# Altium PCB UPCNSL-ABS-PVC-2A.PcbDoc
Units mm, origin at the board's own origin, x right, y up, seen from the top; angles counter-clockwise.
Board outline 82 x 98.4 mm, 2 copper layers (Top Layer, Bottom Layer), stack 0.325 mm thick; 59 components, 56 nets, 164 pads, 48 vias.
Unrouted connection lines stored in the file: 5.
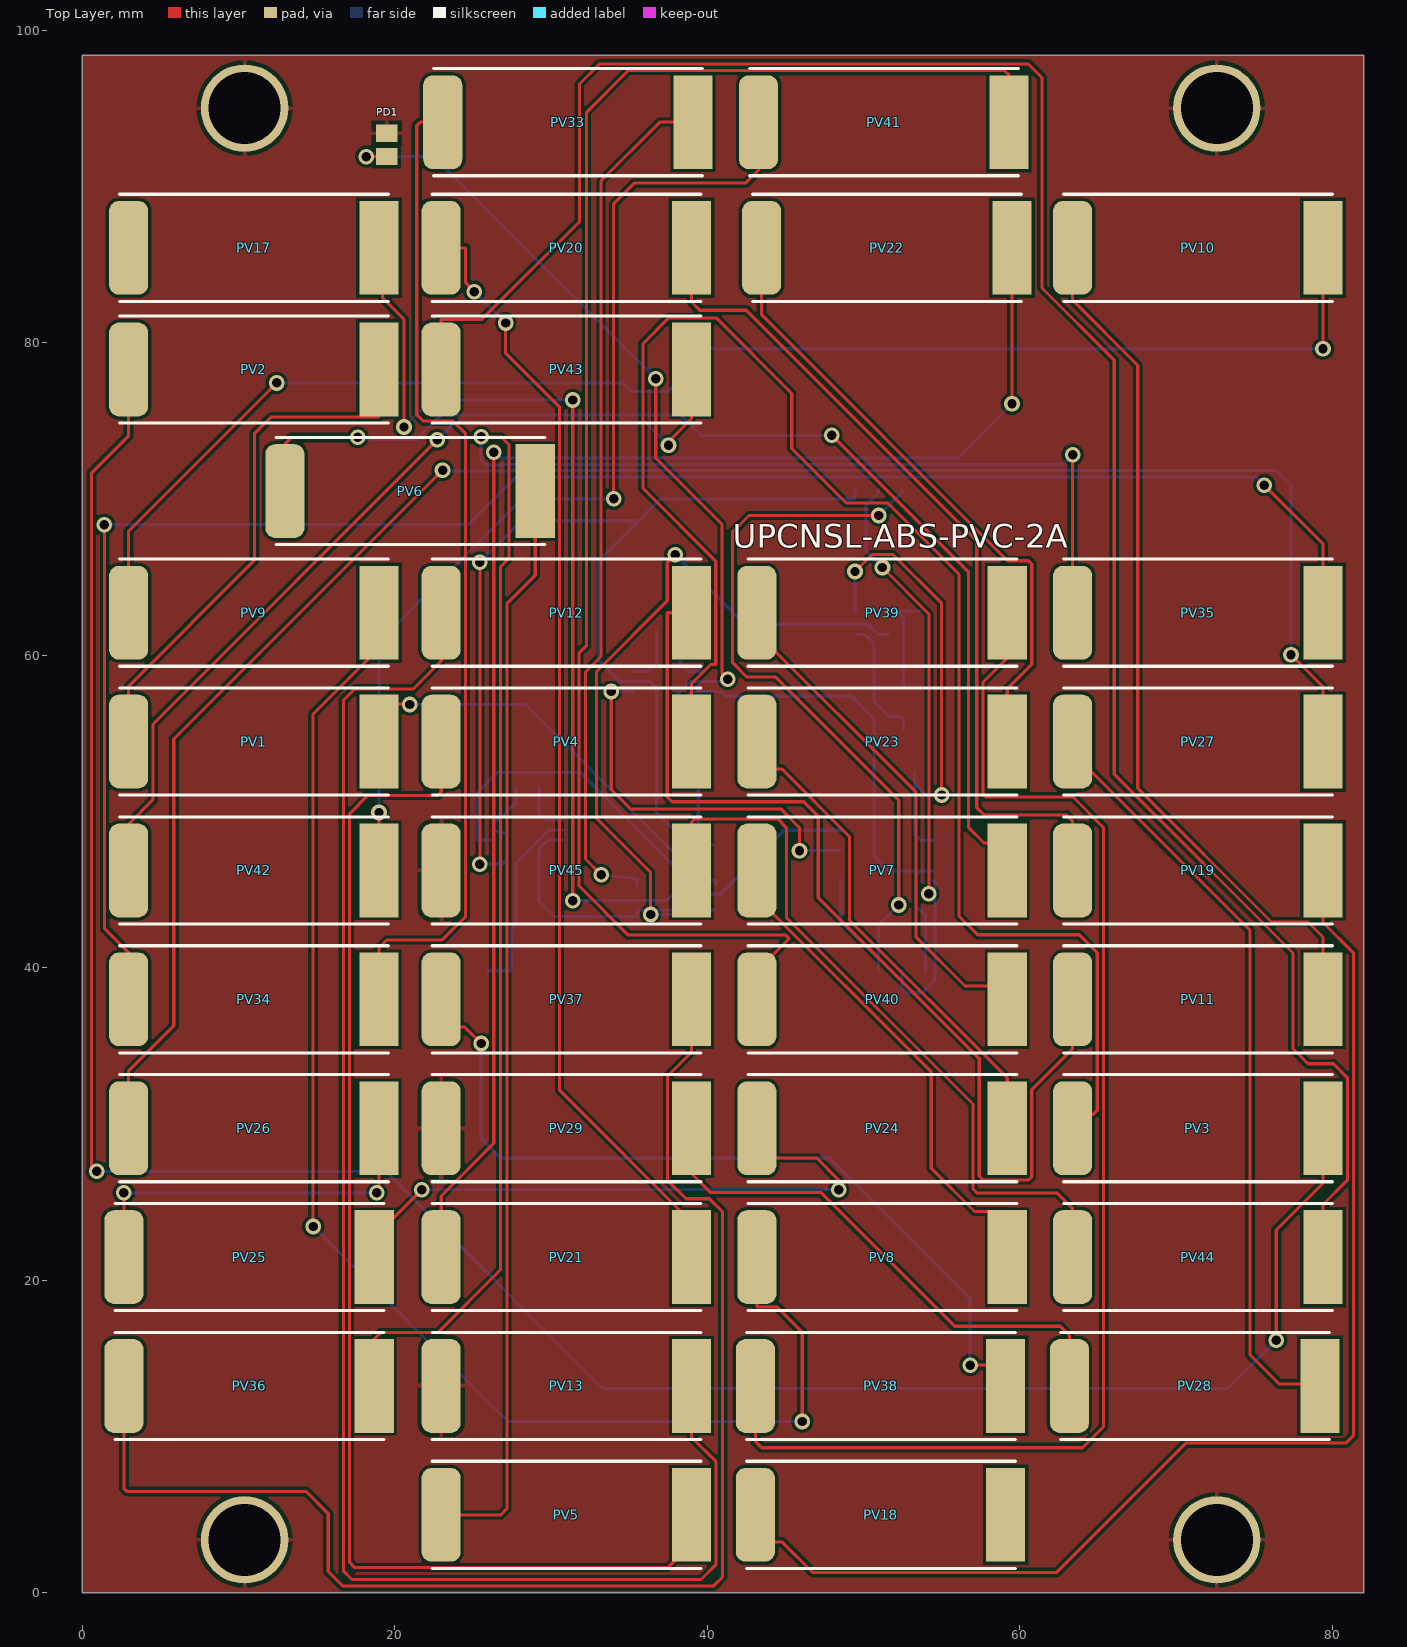
[diagram p0: Top Layer view]
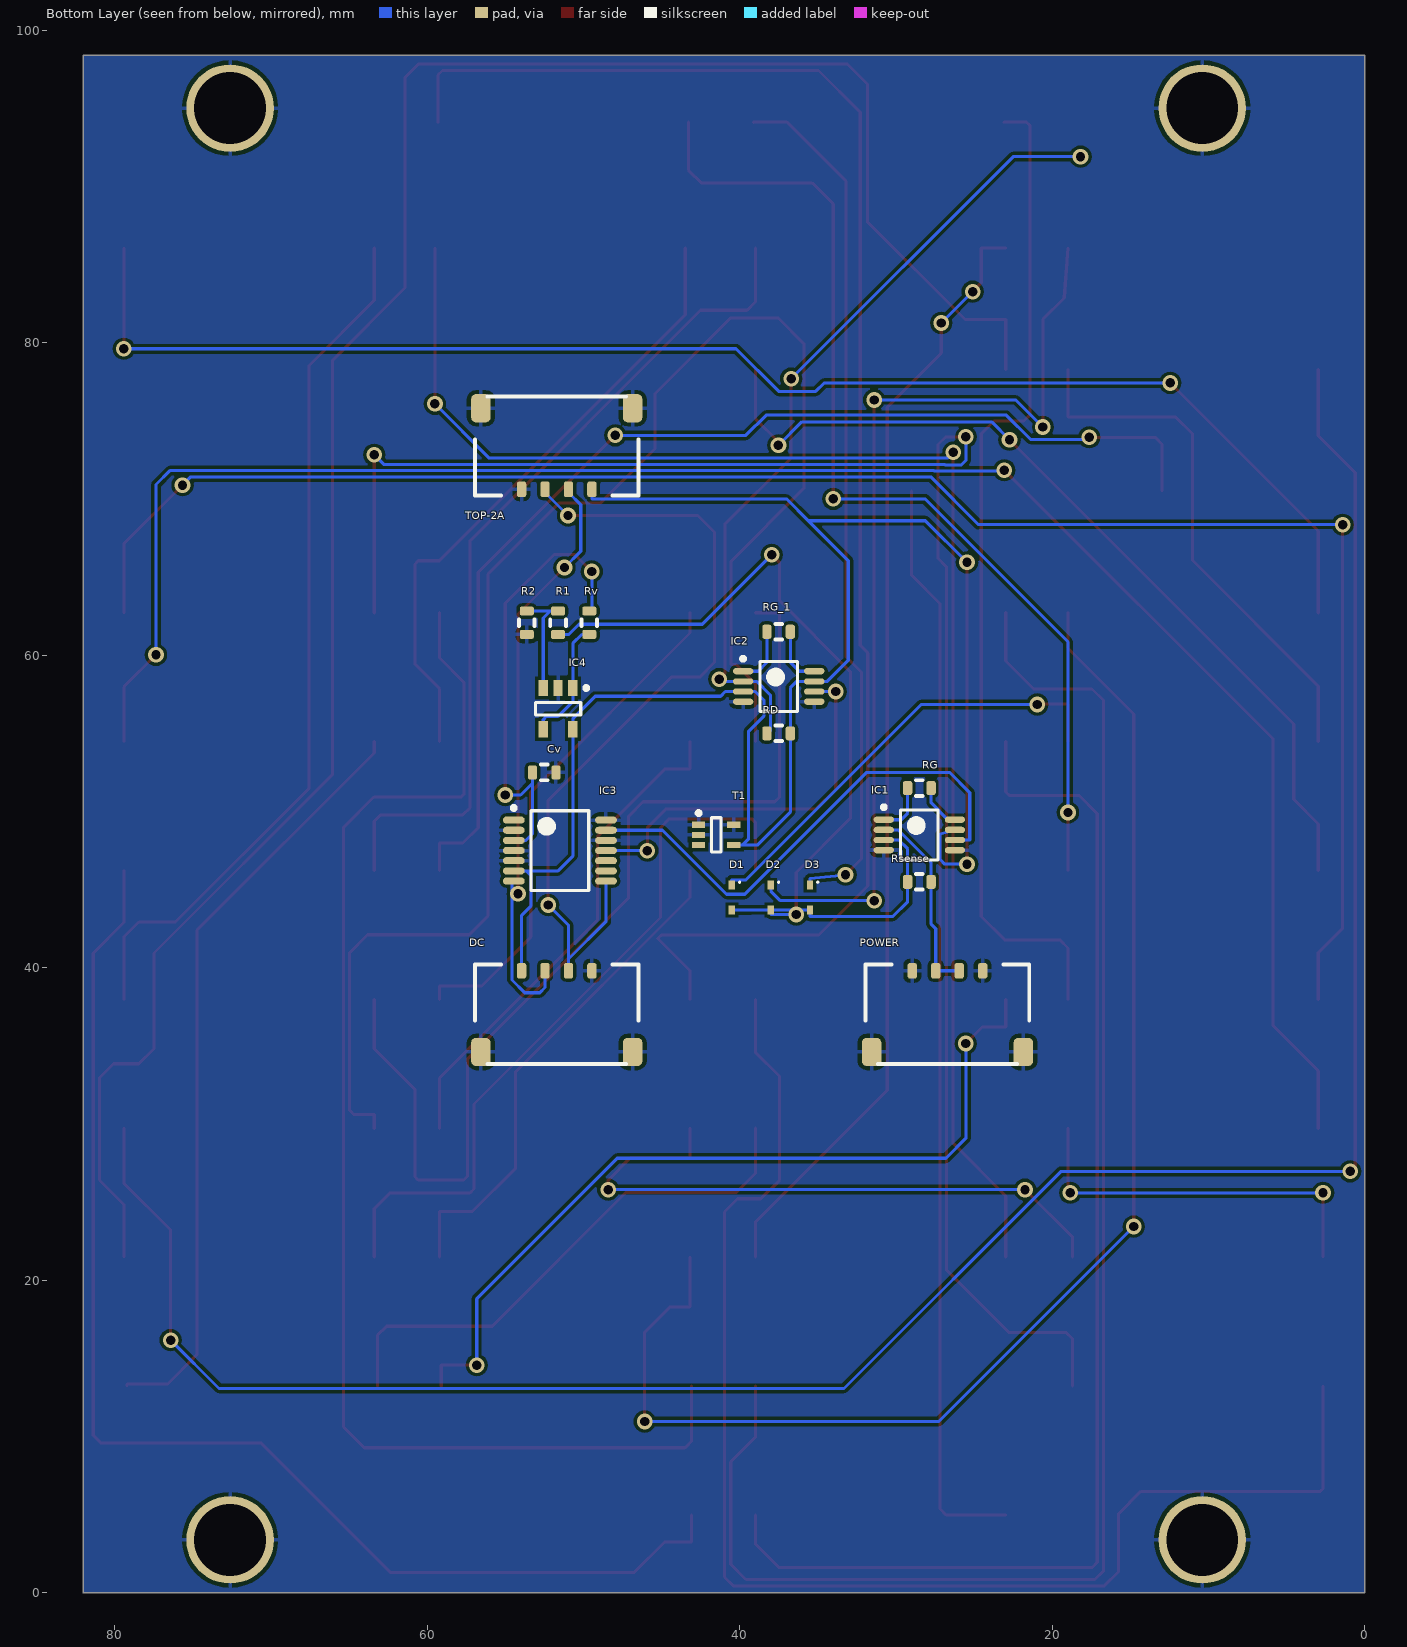
[diagram p1: Bottom Layer view, seen from below]
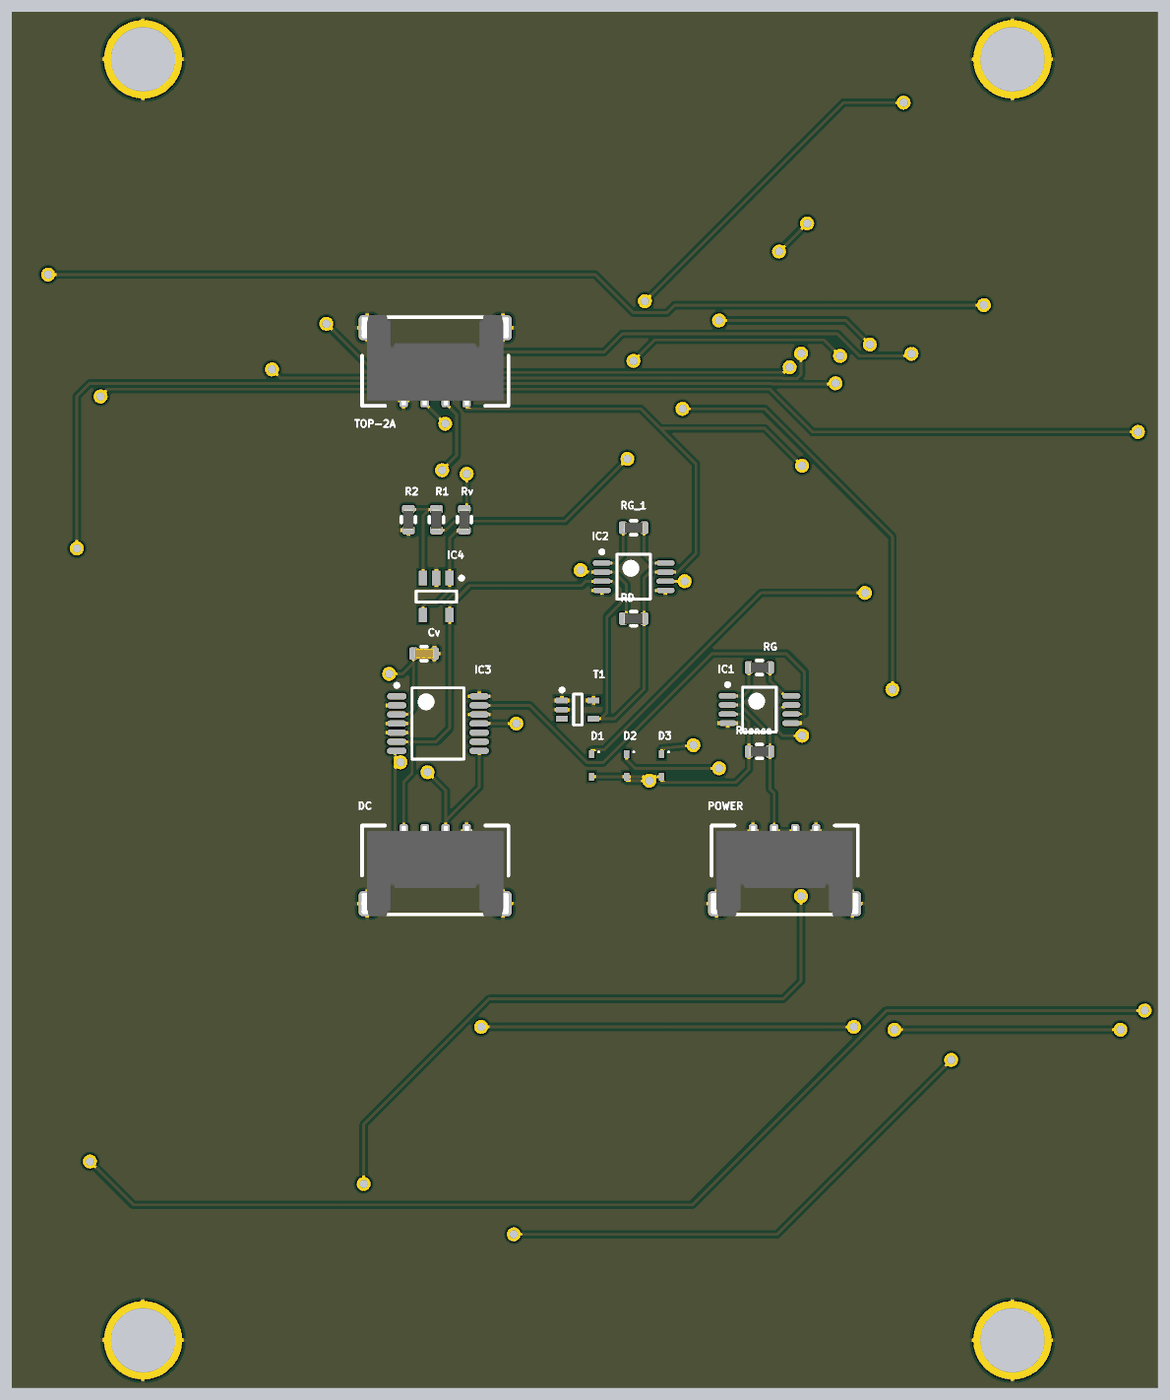
[diagram p2: 3D render of the assembled board from below, using the file's embedded part models]

## Layer stack, top to bottom
Top Solder: solder mask 0.0102, Solder Resist, Dk 3.5
Top Layer: signal copper 0.0356
Dielectric 1: core 0.254, FR-4, Dk 4.2
Bottom Layer: signal copper 0.0356
Bottom Solder: solder mask 0.0102, Solder Resist, Dk 3.5

## Board outline
0,0 82,0 82,98.4 0,98.4

## Design rules (kind name [scope] priority, off if disabled: settings)
Clearance [All] p1: gap=0.2
PolygonConnect [All] p1: connectstyle=Relief reliefconductorwidth=0.256 reliefentries=4 polygonreliefangle="90 Angle" airgapwidth=0.256
RoutingVias [All] p1: holewidth=0.6 width=1 viastyle="Through Hole" minholewidth=0.711 minwidth=1.27 maxholewidth=0.711 maxwidth=1.27
SolderMaskExpansion [All] p1: expansion=0.102
UnpouredPolygon [All] p1: allowunpoured=FALSE
Width [All] p1: maxlimit=1 minlimit=0.2 preferedwidth=0.2
29 further rules are at their usual default settings.

## Components (designator, comment, footprint, x,y, rotation, side; value= is the part's Value field where it differs from the comment)
Cv "CAP0603" CAP0603 52.5,52.5 r0 bottom
D1 "DIODE" "(Schottky diode) SODFL160X70-2N" 40.5,44.5 r270 bottom
D2 "DIODE" "(Schottky diode) SODFL160X70-2N" 38,44.5 r270 bottom
D3 "DIODE" "(Schottky diode) SODFL160X70-2N" 35.5,44.5 r270 bottom
DC "5040500491" 5040500491 51.7,34.619 r180 bottom
IC1 "AD623ARMZ" AD623ARMZ 28.5,48.5 r180 bottom
IC2 "AD623ARMZ" AD623ARMZ 37.5,58 r180 bottom
IC3 "MCP3424" MCP3424 51.5,47.5 r180 bottom
IC4 "AD8603" AD8603 51.616,56.577 r270 bottom
PD1 "Photo Sen" C0805 19.493,92.65 r270 top
POWER "5040500491" 5040500491 26.7,34.619 r180 bottom
PV1 "PVCELL" "PV CELLS" 11,54.473 r180 top
PV2 "PVCELL" "PV CELLS" 11,78.282 r180 top
PV3 "PVCELL" "PV CELLS" 71.4,29.736 r180 top
PV4 "PVCELL" "PV CELLS" 31,54.473 r180 top
PV5 "PVCELL" "PV CELLS" 31,5 r180 top
PV6 "PVCELL" "PV CELLS" 21,70.5 r180 top
PV7 "PVCELL" "PV CELLS" 51.2,46.227 r180 top
PV8 "PVCELL" "PV CELLS" 51.2,21.491 r180 top
PV9 "PVCELL" "PV CELLS" 11,62.718 r180 top
PV10 "PVCELL" "PV CELLS" 71.4,86.064 r180 top
PV11 "PVCELL" "PV CELLS" 71.4,37.982 r180 top
PV12 "PVCELL" "PV CELLS" 31,62.718 r180 top
PV13 "PVCELL" "PV CELLS" 31,13.245 r180 top
PV17 "PVCELL" "PV CELLS" 11,86.064 r180 top
PV18 "PVCELL" "PV CELLS" 51.1,5 r180 top
PV19 "PVCELL" "PV CELLS" 71.4,46.227 r180 top
PV20 "PVCELL" "PV CELLS" 31,86.064 r180 top
PV21 "PVCELL" "PV CELLS" 31,21.491 r180 top
PV22 "PVCELL" "PV CELLS" 51.5,86.064 r180 top
PV23 "PVCELL" "PV CELLS" 51.2,54.473 r180 top
PV24 "PVCELL" "PV CELLS" 51.2,29.736 r180 top
PV25 "PVCELL" "PV CELLS" 10.7,21.491 r180 top
PV26 "PVCELL" "PV CELLS" 11,29.736 r180 top
PV27 "PVCELL" "PV CELLS" 71.4,54.473 r180 top
PV28 "PVCELL" "PV CELLS" 71.2,13.245 r180 top
PV29 "PVCELL" "PV CELLS" 31,29.736 r180 top
PV33 "PVCELL" "PV CELLS" 31.1,94.1 r180 top
PV34 "PVCELL" "PV CELLS" 11,37.982 r180 top
PV35 "PVCELL" "PV CELLS" 71.4,62.718 r180 top
PV36 "PVCELL" "PV CELLS" 10.7,13.245 r180 top
PV37 "PVCELL" "PV CELLS" 31,37.982 r180 top
PV38 "PVCELL" "PV CELLS" 51.1,13.245 r180 top
PV39 "PVCELL" "PV CELLS" 51.2,62.718 r180 top
PV40 "PVCELL" "PV CELLS" 51.2,37.982 r180 top
PV41 "PVCELL" "PV CELLS" 51.3,94.1 r180 top
PV42 "PVCELL" "PV CELLS" 11,46.227 r180 top
PV43 "PVCELL" "PV CELLS" 31,78.282 r180 top
PV44 "PVCELL" "PV CELLS" 71.4,21.491 r180 top
PV45 "PVCELL" "PV CELLS" 31,46.227 r180 top
R1 "RES0603" RES0603 51.616,62.077 r270 bottom
R2 "RES0603" RES0603 53.616,62.077 r90 bottom
RD "RES0603" RES0603 37.5,55 r180 bottom
RG "RES0603" RES0603 28.5,51.5 r180 bottom
RG_1 "RES0603" RES0603 37.5,61.5 r180 bottom
Rsense "RES0603" RES0603 28.5,45.5 r0 bottom
Rv "RES0603" RES0603 49.616,62.077 r90 bottom
T1 "LMT84 DCK" DCK/SOT65P210X110-5N 41.5,48.5 r180 bottom
TOP-2A "5040500491" 5040500491 51.7,75.8 r0 bottom

## Footprints (in the part's own frame and the unit in brackets; to place one, negate y for a bottom-side part, rotate by r counter-clockwise, add the part's x,y. Pads: shape width x height; smd on the part's side, far side on the other; paste and mask are expansions set on the pad)
5040500491 [mm] "1.50mm Pitch Pico-Lock™ Surface Mount Wire-to-Board Header, Right Angle,2.00mm Mated Height, Positive Side Locks, 4 Circuits"
  rrect50% 1.25x1.8 smd: 0(-4.855,0) 0(4.855,0)
  rrect50% 0.6x1 smd: 1(-2.25,5.19) 2(-0.75,5.19) 3(0.75,5.19) 4(2.25,5.19)
  silkscreen extent -5.23,-0.76 5.23,5.59, body extent -5.27,-0.9 5.28,5.54, height 1.98
"(Schottky diode) SODFL160X70-2N" [mm] "SODFL, 2-Leads, Body 0,80x1,60mm, IPC Medium Density"
  rect 0.55x0.4 smd: A(-0.8,0) K(0.8,0)
  silkscreen extent -1.02,0.45 -0.93,0.55, body extent -0.65,-0.45 0.65,0.45, height 0.7
AD623ARMZ [mm] "Single-Supply, Rail-to-Rail, Instrumentation Amplifier"
  oval 1.3x0.4 smd: 1(-2.275,0.975) 2(-2.275,0.325) 3(-2.275,-0.325) 4(-2.275,-0.975) 5(2.275,-0.975) 6(2.275,-0.325) 7(2.275,0.325) 8(2.275,0.975)
  silkscreen extent -2.4,-1.6 1.2,1.9, body extent -1.6,-1.6 1.6,1.6, height 1.1
AD8603 [mm] "SOT23, 5-Leads, Body 2,90x2,80mm, Pitch 0,95mm, IPC Medium Density"
  rect 1.05x0.6 smd: 1(-1.325,0.95) 2(-1.325,0) 3(-1.325,-0.95) 4(1.325,-0.95) 5(1.325,0.95)
  silkscreen extent -1.45,-1.45 0.4,1.92, body extent -0.8,-1.45 0.8,1.45, height 1
C0805 [mm] "Chip Capacitor, Body 2.0x1.3mm, IPC High Density"
  rect 1.1x1.4 smd: 1(-0.75,0) 2(0.75,0)
  body extent -1.1,-0.72 1.1,0.72, height 1.4
CAP0603 [mm] "Capacitor Chip Inductor, Body 0.6x0.3mm, IPC High Density"
  rrect50% 0.6x0.9 smd: 1(-0.75,0) 2(0.75,0)
  silkscreen extent -0.2,-0.5 0.2,0.5, body extent -0.76,-0.38 0.76,0.38, height 0.76
DCK/SOT65P210X110-5N [mm] "SOT23, 5-Leads, Body 2,00x2,10mm, Pitch 0,65mm, IPC Medium Density"
  rect 0.85x0.4 smd: 1(-1.125,0.65) 2(-1.125,0) 3(-1.125,-0.65) 4(1.125,-0.65) 5(1.125,0.65)
  silkscreen extent -1.25,-1.1 0.3,1.52, body extent -0.7,-1.07 0.7,1.08, height 1.1
MCP3424 [mm] "18-Bit, Multi-Channel ?S Analog-to-Digital Converter with  I2C"
  oval 1.4x0.45 smd: 1(-2.95,1.95) 2(-2.95,1.3) 3(-2.95,0.65) 4(-2.95,0) 5(-2.95,-0.65) 6(-2.95,-1.3) 7(-2.95,-1.95) 8(2.95,-1.95) 9(2.95,-1.3) 10(2.95,-0.65) 11(2.95,0) 12(2.95,0.65) 13(2.95,1.3) 14(2.95,1.95)
  silkscreen extent -3.08,-2.55 1.85,2.85, body extent -2.25,-2.55 2.25,2.55, height 1.2
"PV CELLS" [mm] "IXYS KXOB22-12X1L-ND"
  rect 2.5x6 smd: 1(-7.993,0)
  rrect50% 2.5x6 smd: 2(8.025,0)
  silkscreen extent -8.6,-3.43 8.6,3.43, body extent -8.97,-3.5 9.03,3.5, height 1.8
RES0603 [mm] "Resistor Chip Inductor, Body 0.6x0.3mm, IPC High Density"
  rrect50% 0.6x0.9 smd: 1(-0.75,0) 2(0.75,0)
  silkscreen extent -0.2,-0.5 0.2,0.5, body extent -0.76,-0.38 0.76,0.38, height 0.76

## Part data
Cv: "Capacitor"
DC POWER TOP-2A: library part MOLEX_5040500491, "1.50mm Pitch Pico-Lock™ Surface Mount Wire-to-Board Header, Right Angle,2.00mm Mated Height, Positive Side Locks, 4 Circuits"
IC3: "18-Bit, Multi-Channel ?S Analog-to-Digital Converter with  I2C"
PD1: "Photosensitive Diode"
PV1 PV2 PV3 PV4 PV5 PV6 PV7 PV8 PV9 PV10 PV11 PV12 PV13 PV17 PV18 PV19 PV20 PV21 PV22 PV23 PV24 PV25 PV26 PV27 PV28 PV29 PV33 PV34 PV35 PV36 PV37 PV38 PV39 PV40 PV41 PV42 PV43 PV44 PV45: library part PVCELLS, "IXYS KXOB22-12X1L-ND"
R1 R2 RD RG RG_1 Rsense Rv: "Resistor"

## Free pads (board coordinates)
  round 5.6 hole 4.6: 0(10.4,95) 1(72.6,95) 2(72.6,3.4) 3(10.4,3.4)

## Via types
v1: diameter 1, hole 0.6, Top Layer to Bottom Layer, 48 vias

## Nets (pads, with @x,y where several pads share a name; then routed paths per layer and width w, separated by ;. In a path a pad name is that pad's centre, name@x,y a point inside that pad or via, vN(x,y) a via of type N, cw(c..) or ccw(c..) an arc to the next point about the centre after c; other vN are vias at no path point)
5V: DC.1 IC1.7 IC2.3 IC2.7 IC3.6 IC4.5 RD.2 T1.4 TOP-2A.1 | length 119.7
  Top Layer w0.2: v1(25.451,46.634) v1(25.451,65.938)
  Bottom Layer w0.2: v1(25.451,46.634) 26.873,46.634 27.178,46.939 27.178,48.565 IC1.7 ; v1(25.451,65.938) 28.118,68.605 35.611,68.605 ; T1.4 39.827,47.85 ; TOP-2A.1 49.45,69.999 37.004,69.999 35.611,68.605 ; DC.1 53.95,43.352 53.353,43.949 53.353,45.908 53.645,46.2 ; IC3.6 53.645,46.2 ; 35.611,68.605 33.045,66.04 33.045,59.671 34.392,58.325 IC2.7 36.337,58.325 36.75,57.912 RD.2 36.75,49.962 38.862,47.85 39.827,47.85 ; 39.827,47.85 39.421,48.256 39.421,55.143 38.43,56.134 38.43,57.099 39.006,57.675 IC2.3 40.908,57.675 41.213,57.371 49.233,57.371 50.666,55.938 IC4.5 50.666,47.147 51.613,46.2 53.645,46.2
GND: Cv.1 DC.0 DC.4 IC1.4 IC1.5 IC2.4 IC2.5 IC3.2 IC3.4 IC3.5 IC3.12 IC3.14 IC4.2 pad.0 pad.1 pad.2 pad.3 PD1.1 POWER.0 POWER.1 POWER.4 PV13.2 PV29.2 PV45.2 R2.1 T1.1 T1.2 T1.5 TOP-2A.0 TOP-2A.4
IRR: IC2.6 IC3.11 | length 24.8
  Top Layer w0.2: v1(33.852,57.675) 33.852,51.41 35.09,50.171 44.698,50.171 45.898,48.971 v1(45.898,47.5)
  Bottom Layer w0.2: v1(33.852,57.675) IC2.6 ; v1(45.898,47.5) IC3.11
ISENSE: IC1.6 IC3.13 | length 32.7
  Bottom Layer w0.2: IC1.6 25.273,48.175 25.273,51.206 26.568,52.502 31.873,52.502 39.671,44.704 40.837,44.704 44.933,48.8 IC3.13
NetIC1_1: IC1.1 RG.1 | length 3.3
  Bottom Layer w0.2: RG.1 29.25,49.892 29.667,49.475 IC1.1
NetIC1_8: IC1.8 RG.2 | length 2.9
  Bottom Layer w0.2: IC1.8 26.674,49.475 27.75,50.551 RG.2
NetIC2_1: IC2.1 RG_1.1 | length 3.7
  Bottom Layer w0.2: RG_1.1 38.25,59.538 38.813,58.975 IC2.1
NetIC2_2: IC2.2 PD1.2 RD.1 | length 53.2
  Top Layer w0.2: v1(18.186,91.9) PD1.2 ; v1(36.703,77.699) 36.703,72.619 40.943,68.378 40.943,58.828 v1(41.3,58.471)
  Bottom Layer w0.2: v1(18.186,91.9) 22.502,91.9 v1(36.703,77.699) ; RD.1 38.25,55.143 38.024,55.143 38.024,57.436 38.913,58.325 IC2.2 41.155,58.325 v1(41.3,58.471)
NetIC2_8: IC2.8 RG_1.2 | length 3.7
  Bottom Layer w0.2: IC2.8 36.187,58.975 36.75,59.538 RG_1.2
NetPV1_2: PV1.2 PV2.1 | length 34.5
  Top Layer w0.2: PV1.2 2.975,58.024 11.024,66.072 11.024,74.168 12.09,75.235 18.993,75.235 PV2.1
NetPV2_2: PV2.2 PV3.1 | length 149.7
  Top Layer w0.2: v1(0.94,26.975) 0.61,27.305 0.61,71.679 2.975,74.045 PV2.2 ; v1(76.403,16.18) 76.403,23.223 79.393,26.213 PV3.1
  Bottom Layer w0.2: v1(0.94,26.975) 19.431,26.975 33.325,13.081 73.304,13.081 v1(76.403,16.18)
NetPV3_2: PV3.2 PV4.1 | length 102.3
  Top Layer w0.2: PV4.1 38.993,58.17 40.234,59.411 40.543,59.411 40.543,66.018 35.89,70.671 35.89,79.934 37.541,81.585 40.564,81.585 45.401,76.747 45.401,73.221 48.874,69.748 51.531,69.748 56.109,65.171 56.109,43.307 57.302,42.113 63.805,42.113 64.948,40.97 64.948,30.886 64.668,30.607 63.375,30.607 PV3.2
NetPV4_2: PV4.2 PV5.1 | length 82.1
  Top Layer w0.2: PV4.2 22.975,51.245 22.758,51.029 18.288,51.029 17.12,49.86 17.12,1.956 17.45,1.626 37.469,1.626 38.993,3.15 PV5.1
NetPV5_2: PV5.2 PV6.1 | length 70.3
  Top Layer w0.2: PV5.2 22.975,4.978 26.772,4.978 27.178,5.385 27.178,63.297 28.993,65.112 PV6.1
NetPV6_2: PV6.2 PV7.1 | length 72.8
  Top Layer w0.2: PV6.2 12.975,73.504 13.411,73.939 v1(17.628,73.939) ; v1(47.955,74.066) 56.718,65.303 56.718,48.971 57.709,47.981 59.193,47.981 PV7.1
  Bottom Layer w0.2: v1(17.628,73.939) 17.767,73.8 21.375,73.8 22.937,75.362 38.303,75.362 39.599,74.066 v1(47.955,74.066)
NetPV7_2: PV7.2 PV8.1 | length 32.6
  Top Layer w0.2: PV7.2 43.175,44.501 54.331,33.345 54.331,27.178 57.099,24.409 59.193,24.409 PV8.1
NetPV9_2: PV9.2 PV10.1 | length 93.4
  Top Layer w0.2: PV9.2 2.975,67.948 v1(12.446,77.419) ; v1(79.393,79.604) PV10.1
  Bottom Layer w0.2: v1(12.446,77.419) 34.592,77.419 35.135,76.877 37.501,76.877 40.228,79.604 v1(79.393,79.604)
NetPV10_2: PV10.2 PV11.1 | length 56.1
  Top Layer w0.2: PV10.2 63.375,82.702 67.539,78.539 67.539,51.486 76.098,42.926 78.435,42.926 79.393,41.968 PV11.1
NetPV11_2: PV11.2 PV12.1 | length 66.8
  Top Layer w0.2: PV12.1 37.44,62.718 37.44,50.927 37.744,50.622 46.177,50.622 47.102,49.698 47.102,44.484 57.404,34.181 57.404,26.675 57.663,26.416 60.554,26.416 60.757,26.619 60.757,32.207 63.375,34.826 PV11.2
NetPV12_2: PV12.2 PV13.1 | length 102.6
  Top Layer w0.2: PV12.2 22.975,59.627 21.184,57.836 17.45,57.836 16.713,57.099 16.713,1.422 17.272,0.864 39.599,0.864 40.564,1.829 40.564,8.386 38.993,9.957 PV13.1
NetPV17_2: PV17.2 PV18.1
NetPV18_2: PV18.2 PV19.1 | length 81.4
  Top Layer w0.2: PV18.2 43.075,3.251 44.806,3.251 46.736,1.321 62.357,1.321 70.637,9.601 80.874,9.601 81.356,10.084 81.356,40.938 79.393,42.901 PV19.1
NetPV19_2: PV19.2 PV20.1 | length 54.8
  Top Layer w0.2: PV20.1 38.993,82.597 39.521,82.069 42.5,82.069 57.243,67.326 57.243,50.249 57.708,49.784 62.969,49.784 63.375,49.378 PV19.2
NetPV20_2: PV20.2 PV21.1 | length 72.1
  Top Layer w0.2: PV20.2 24.536,86.064 24.536,83.82 v1(25.095,83.261) ; v1(27.102,81.255) 27.102,79.324 30.556,75.87 30.556,32.161 38.993,23.724 PV21.1
  Bottom Layer w0.2: v1(25.095,83.261) v1(27.102,81.255)
NetPV21_2: PV21.2 PV22.1 | length 97.6
  Top Layer w0.2: PV21.2 22.975,25.4 26.34,28.765 v1(26.34,72.974) ; v1(59.493,76.079) PV22.1
  Bottom Layer w0.2: v1(26.34,72.974) 26.703,72.611 56.025,72.611 v1(59.493,76.079)
NetPV22_2: PV22.2 PV23.1 | length 40.2
  Top Layer w0.2: PV22.2 43.475,81.772 59.207,66.04 60.554,66.04 60.757,65.837 60.757,59.411 59.193,57.847 PV23.1
NetPV23_2: PV23.2 PV24.1 | length 32.3
  Top Layer w0.2: PV23.2 43.175,52.73 44.755,52.73 49.098,48.387 49.098,43.053 59.193,32.958 PV24.1
NetPV25_2: PV25.2 PV26.1 | length 24.5
  Top Layer w0.2: PV25.2 v1(2.675,25.603) ; v1(18.847,25.603) 18.993,25.75 PV26.1
  Bottom Layer w0.2: v1(2.675,25.603) v1(18.847,25.603)
NetPV26_2: PV26.2 PV27.1 | length 122.4
  Top Layer w0.2: PV26.2 2.975,33.404 5.867,36.297 5.867,54.635 v1(23.063,71.831) ; v1(77.343,60.02) 79.393,57.97 PV27.1
  Bottom Layer w0.2: v1(23.063,71.831) 23.12,71.774 27.54,71.774 27.577,71.811 76.449,71.811 77.343,70.917 v1(77.343,60.02)
NetPV27_2: PV27.2 PV28.1 | length 49.3
  Top Layer w0.2: PV27.2 63.375,53.746 74.727,42.395 74.727,15.24 76.606,13.36 79.193,13.36 PV28.1
NetPV28_2: PV28.2 PV29.1 | length 34.6
  Top Layer w0.2: PV29.1 38.993,26.836 40.201,25.629 47.269,25.629 55.829,17.069 62.586,17.069 63.175,16.479 PV28.2
NetPV33_2: PV33.2 PV34.1 | length 64.4
  Top Layer w0.2: PV34.1 18.993,41.269 19.507,41.783 23.038,41.783 24.536,43.282 24.536,74.168 23.724,74.981 21.819,74.981 21.412,75.387 21.412,93.878 21.641,94.107 23.075,94.107 PV33.2
NetPV34_2: PV34.2 PV35.1 | length 116.4
  Top Layer w0.2: v1(1.422,68.351) 1.422,42.52 2.975,40.967 PV34.2 ; v1(75.641,70.884) 79.393,67.132 PV35.1
  Bottom Layer w0.2: v1(1.422,68.351) 24.714,68.351 27.774,71.411 75.114,71.411 v1(75.641,70.884)
NetPV35_2: PV35.2 PV36.1 | length 117.8
  Top Layer w0.2: PV36.1 18.693,16.253 19.101,16.661 22.757,16.661 26.772,20.676 26.772,65.659 27.305,66.192 27.305,73.482 26.822,73.965 v1(25.527,73.965) ; PV35.2 v1(63.375,72.822)
  Bottom Layer w0.2: v1(25.527,73.965) 25.527,72.454 25.806,72.174 26.861,72.174 26.897,72.211 62.764,72.211 v1(63.375,72.822)
NetPV36_2: PV36.2 PV37.1 | length 89.8
  Top Layer w0.2: PV36.2 2.675,6.68 2.853,6.502 14.326,6.502 15.748,5.08 15.748,1.372 16.662,0.457 40.411,0.457 40.97,1.016 40.97,24.384 40.132,25.222 38.637,25.222 37.443,26.416 37.443,33.049 38.993,34.599 PV37.1
NetPV37_2: PV37.2 PV38.1 | length 54.2
  Top Layer w0.2: PV37.2 22.975,36.22 24.46,36.22 v1(25.527,35.154) ; v1(56.82,14.58) 59.093,14.58 PV38.1
  Bottom Layer w0.2: v1(25.527,35.154) 25.527,29.083 26.797,27.813 47.828,27.813 56.82,18.821 v1(56.82,14.58)
NetPV38_2: PV38.2 PV39.1 | length 85.7
  Top Layer w0.2: PV38.2 43.075,9.706 43.485,9.296 64.008,9.296 65.354,10.643 65.354,48.971 63.398,50.927 57.81,50.927 57.643,51.094 57.643,58.268 59.193,59.818 PV39.1
NetPV39_2: PV39.2 PV40.1 | length 33
  Top Layer w0.2: PV39.2 43.175,61.417 53.365,51.227 53.365,41.961 56.49,38.837 59.193,38.837 PV40.1
NetPV41_2: PV41.2 PV42.1 | length 65.5
  Top Layer w0.2: PV42.1 v1(18.993,49.936) ; v1(34.011,70.002) 34.011,88.875 35.357,90.221 42.462,90.221 43.275,91.034 PV41.2
  Bottom Layer w0.2: v1(18.993,49.936) 18.993,60.852 28.143,70.002 v1(34.011,70.002)
NetPV42_2: PV42.2 PV43.1 | length 57.1
  Top Layer w0.2: PV42.2 2.975,49.203 4.547,50.775 4.547,55.601 v1(22.733,73.787) ; v1(37.516,73.431) 37.516,73.66 38.993,75.137 PV43.1
  Bottom Layer w0.2: v1(22.733,73.787) 23.876,74.93 36.017,74.93 v1(37.516,73.431)
NetPV43_2: PV43.2 PV44.1 | length 139.1
  Top Layer w0.2: PV43.2 22.975,81.483 25.578,81.483 31.826,87.732 31.826,96.545 33.096,97.815 60.554,97.815 61.417,96.952 61.417,83.49 66.04,78.867 66.04,52.375 77.47,40.945 77.47,34.823 78.435,33.858 80.061,33.858 80.95,32.969 80.95,26.416 79.393,24.859 PV44.1
NetPV44_2: PV44.2 PV45.1 | length 47.5
  Top Layer w0.2: PV45.1 38.993,49.306 39.218,49.53 44.501,49.53 45.06,48.971 45.06,43.219 56.996,31.282 56.996,25.85 57.243,25.603 62.359,25.603 63.375,24.587 PV44.2
PV9: PV8.2 PV9.1 | length 90
  Top Layer w0.2: v1(14.783,23.444) 14.783,56.242 18.993,60.452 PV9.1 ; PV8.2 43.175,18.288 44.475,18.288 46.076,16.688 v1(46.076,10.973)
  Bottom Layer w0.2: v1(14.783,23.444) 27.254,10.973 v1(46.076,10.973)
PV25: PV24.2 PV25.1 | length 40.6
  Top Layer w0.2: PV25.1 18.693,22.757 v1(21.742,25.806) ; PV24.2 43.175,27.838 46.99,27.838 48.412,26.416 v1(48.412,25.806)
  Bottom Layer w0.2: v1(21.742,25.806) v1(48.412,25.806)
PV41: PV40.2 PV41.1 | length 100.5
  Top Layer w0.2: PV40.2 43.175,39.816 45.235,41.875 45.023,42.088 34.95,42.088 31.801,45.237 31.801,60.147 32.283,60.63 32.283,94.742 34.95,97.409 59.014,97.409 59.293,97.13 PV41.1
SCL: DC.3 IC3.8 TOP-2A.3 | length 52.2
  Top Layer w0.2: v1(50.977,68.936) 42.672,68.936 41.605,67.869 41.605,59.538 42.545,58.598 44.375,58.598 52.248,50.725 v1(52.248,44.018)
  Bottom Layer w0.2: IC3.8 48.539,45.55 48.539,42.977 50.95,40.566 ; DC.3 50.95,40.566 ; v1(50.977,68.936) 52.45,70.409 TOP-2A.3 ; v1(52.248,44.018) 50.95,42.72 50.95,40.566
SDA: DC.2 IC3.7 TOP-2A.2 | length 38.3
  Top Layer w0.2: v1(51.206,65.608) 54.178,62.636 v1(54.178,44.729)
  Bottom Layer w0.2: TOP-2A.2 50.95,70.409 50.165,69.624 50.165,66.65 v1(51.206,65.608) ; DC.2 52.45,38.736 52.781,38.405 53.746,38.405 54.559,39.218 v1@54.559,44.729 ; v1(54.178,44.729) v1@54.559,44.729 ; IC3.7 54.559,45.55 v1@54.559,44.729
TEMP: IC3.1
VCC: D1.K D2.K D3.K IC1.3 R1.2 Rsense.2 | length 61.4
  Top Layer w0.2: v1(36.373,43.41) 36.373,46.101 32.914,49.56 32.914,58.949 37.44,63.475 37.44,65.913 v1(37.948,66.421)
  Bottom Layer w0.2: IC1.3 29.82,48.175 29.25,47.605 Rsense.2 29.25,44.228 30.197,43.281 35.5,43.281 D3.K 36.728,43.7 D2.K ; v1(36.373,43.41) 38,43.41 D2.K ; v1(37.948,66.421) 42.393,61.976 50.278,61.976 50.927,61.327 R1.2 ; D1.K 39.243,43.7 D2.K
VCC_1: D1.A PV1.1 | length 28.9
  Top Layer w0.2: PV1.1 18.993,56.871 20.93,56.871 v1(20.955,56.845)
  Bottom Layer w0.2: v1(20.955,56.845) 28.375,56.845 39.595,45.625 40.5,45.625 D1.A
VCC_2: D2.A PV17.1 | length 62.8
  Top Layer w0.2: PV17.1 19.228,82.855 20.599,81.483 v1(20.599,74.6) ; v1(31.394,44.298) v1(31.394,76.327)
  Bottom Layer w0.2: v1(20.599,74.6) 22.327,76.327 v1(31.394,76.327) ; v1(31.394,44.298) 37.39,44.298 38,44.907 D2.A
VCC_3: D3.A PV33.1 | length 55.4
  Top Layer w0.2: v1(33.223,45.949) 32.207,46.965 32.207,58.928 33.198,59.919 33.198,90.348 36.957,94.107 39.093,94.107 PV33.1
  Bottom Layer w0.2: v1(33.223,45.949) 35.5,45.72 D3.A
VD: IC4.1 IC4.4 Rv.1 | length 8
  Bottom Layer w0.2: Rv.1 50.096,61.327 50.666,60.757 IC4.1 50.666,57.03 51.613,56.083 52.362,56.083 52.566,55.88 IC4.4
VDD: IC1.2 POWER.2 POWER.3 Rsense.1 | length 12.4
  Bottom Layer w0.2: POWER.3 POWER.2 27.45,42.494 27.75,42.794 Rsense.1 27.75,46.705 29.87,48.825 IC1.2
VDIV: IC4.3 R1.1 R2.2 | length 7.1
  Bottom Layer w0.2: R1.1 52.121,62.827 ; IC4.3 52.566,62.382 52.121,62.827 ; R2.2 52.121,62.827
VOLT: Cv.2 IC3.3 Rv.2 | length 29.6
  Top Layer w0.2: v1(49.454,65.354) 50.546,66.446 51.867,66.446 54.991,63.322 v1(54.991,51.054)
  Bottom Layer w0.2: v1(49.454,65.354) 49.454,62.827 Rv.2 ; Cv.2 53.25,51.816 ; IC3.3 53.665,48.15 53.25,48.565 53.25,51.816 ; v1(54.991,51.054) 54.012,51.054 53.25,51.816
pads on no net: IC3.9 IC3.10 T1.3

## Polygon pours and split planes (outlines as drawn)
GND on Bottom Layer "Bottom" (solid, pour order 9): 0,0 0,98.4 82,98.4 82,0
GND on Top Layer "Top" (solid, pour order 13): 0,98.4 0,0 82,0 82,98.4

## Silkscreen, mask and mechanical layers (free items; w line width, h text height)
Top Overlay:
  text "UPCNSL-ABS-PVC-2A" at 41.625,66.875 h1.52
Mechanical 3:
  lines w2: -1,0 ccw(c0,0) 0,-1 ; -1,0 ccw(c0,0) 0,-1 ; -1,0 -1,98.4 ; -1,98.4 cw(c0,98.4) 0,99.4 ; -1,98.4 cw(c0,98.4) 0,99.4 ; 0,-1 82,-1 ; 0,99.4 82,99.4 ; 82,-1 ccw(c82,0) 83,0 ; 82,-1 ccw(c82,0) 83,0 ; 82,99.4 cw(c82,98.4) 83,98.4 ; 82,99.4 cw(c82,98.4) 83,98.4 ; 83,0 83,1 83,98.4